# EAGLE board WSTL18P2 (EAGLE 7.7.0)
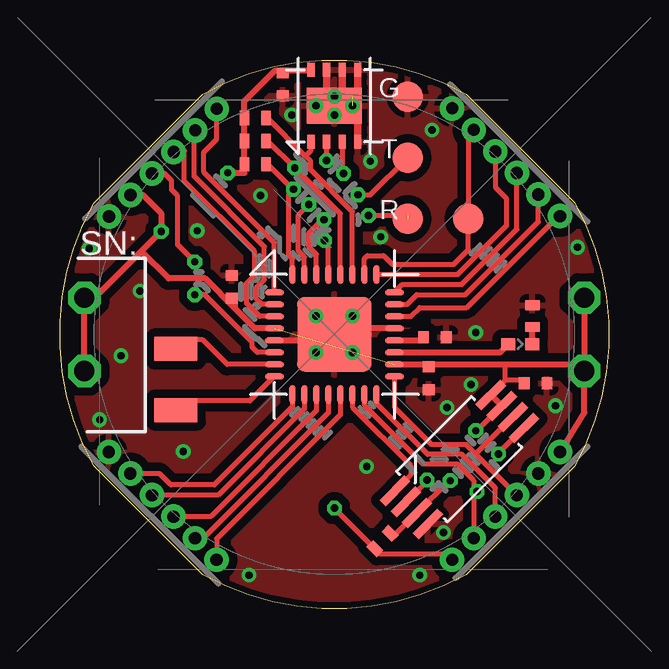
[diagram p0: board, top side]
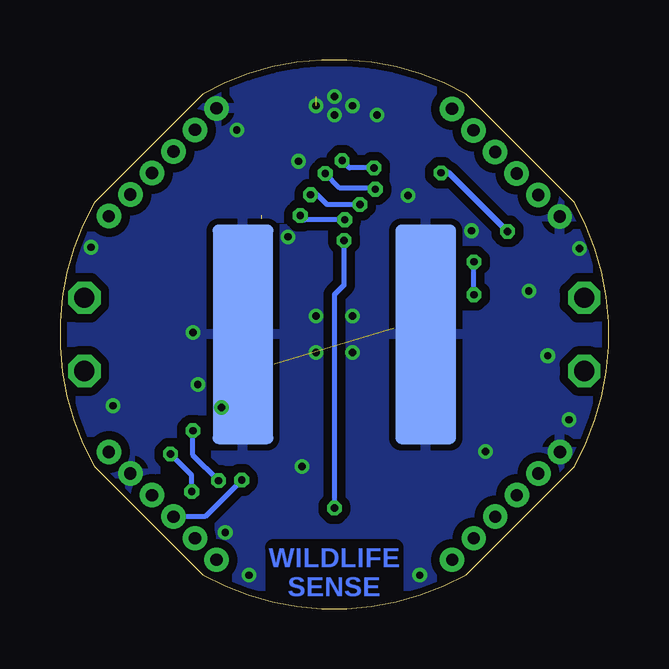
[diagram p1: board, bottom side, seen from below]

Size 22.86 x 22.86 mm. Coordinates in mm from the lower left corner, seen from the top.
Outline: 5.95,1.42 1.42,5.95 arc-59 1.42,16.92 5.95,21.44 arc-59 16.92,21.44 21.44,16.92 arc-59 21.44,5.95 16.92,1.42 arc-59 5.95,1.42
Copper layers (1*16): Top 0.035mm / dielectric 1.5mm / Bottom 0.035mm
Design rules "Nikos-SeeedStudio_2layer_DRU_no_angle_20140221": minimum track width 6mil, minimum drill 12mil, track to track 6mil, track to pad 6mil, pad to pad 6mil, via to via 6mil, smd to smd 0mil, copper to edge 10mil, drill to drill 10mil, minimum pad ring 10mil, minimum via ring 6mil, stop-mask expansion 0mil, vias tented up to drill 100mil, thermal gap 10mil
Net classes: 1 GND: width 0.254 mm, drill 0.305 mm, clearance 0.356 mm; 2 Signal: width 0.203 mm, drill 0.305 mm, clearance 0.203 mm

## Footprints (pad centres in the part's own frame; a part is rotated, then mirrored left to right if it is on the bottom)
CAP_0402 = smd 0.45 x 0.5: 1 -0.475,0; 2 0.475,0
1X6_1.27_ROUND = drill 0.508 pad 0.813: 1 0,0; 2 1.27,0; 3 2.54,0; 4 3.81,0; 5 5.08,0; 6 6.35,0
LED_0402 = smd 0.6 x 0.5: ANODE -0.5,0; CATHODE 0.5,0
ATMEGA328PB_VFQFN32 = smd 0.8 x 0.25: 1 -2.5,1.75; 2 -2.5,1.25; 3 -2.5,0.75; 4 -2.5,0.25; 5 -2.5,-0.25; 6 -2.5,-0.75; 7 -2.5,-1.25; 8 -2.5,-1.75; 17 2.5,-1.75; 18 2.5,-1.25; 19 2.5,-0.75; 20 2.5,-0.25; 21 2.5,0.25; 22 2.5,0.75; 23 2.5,1.25; 24 2.5,1.75 | smd 0.25 x 0.8: 9 -1.75,-2.5; 10 -1.25,-2.5; 11 -0.75,-2.5; 12 -0.25,-2.5; 13 0.25,-2.5; 14 0.75,-2.5; 15 1.25,-2.5; 16 1.75,-2.5; 25 1.75,2.5; 26 1.25,2.5; 27 0.75,2.5; 28 0.25,2.5; 29 -0.25,2.5; 30 -0.75,2.5; 31 -1.25,2.5; 32 -1.75,2.5 | smd 3.1 x 3.1: PAD 0,0
TSSSOP-8 = smd 1.45 x 0.35: 1 -2.825,0.975; 2 -2.825,0.325; 3 -2.825,-0.325; 4 -2.825,-0.975; 5 2.825,-0.975; 6 2.825,-0.325; 7 2.825,0.325; 8 2.825,0.975
RES_0402 = smd 0.4 x 0.6: 1 -0.45,0; 2 0.45,0
ABS07AIG = smd 1.8 x 1: P$1 0,1.275; P$2 0,-1.275
MAX30205_TDFN8 = smd 0.6 x 0.3: 1 -1.5,0.975; 2 -1.5,0.325; 3 -1.5,-0.325; 4 -1.5,-0.975; 5 1.5,-0.975; 6 1.5,-0.325; 7 1.5,0.325; 8 1.5,0.975 | smd 1.5 x 2.3: PAD 0,0
CR2032-LINX-M-THM = drill 0.838 octagon: BATT1 -10.414,1.524; BATT2 -10.414,-1.524; BATT3 10.414,-1.524; BATT4 10.414,1.524 | smd 2.54 x 9.144: GND 3.81,0; GND1 -3.81,0
4_PIN_0.1INCH_POGO_PADS_ANGLE = smd 1.27 x 1.27: 1 0,2.54; 2 0,0; 3 -2.54,0; 4 -5.08,0

## Placement (x,y rotation side)
C1  0.1uF  [CAP_0402]  7.16,13.41 90 top
C2  0.1uF  [CAP_0402]  15.37,9.6 270 top
C3  0.1uF  [CAP_0402]  15.62,11.3 0 top
C4  0.1uF  [CAP_0402]  9.27,21.85 270 top
C5  0.1uF  [CAP_0402]  19.81,9.4 0 top
CON1  1X6CONN-1.27-ROUND  [1X6_1.27_ROUND]  20.83,6.53 225 top
CON2  1X6CONN-1.27-ROUND  [1X6_1.27_ROUND]  2.03,6.53 315 top
CON3  1X6CONN-1.27-ROUND  [1X6_1.27_ROUND]  20.83,16.36 135 top
CON4  1X6CONN-1.27-ROUND  [1X6_1.27_ROUND]  6.53,20.83 225 top
LED0  LED_0402  [LED_0402]  19.18,11.03 0 top
MCU  ATMEGA328PBVQFN32  [ATMEGA328PB_VFQFN32]  11.43,11.43 0 top
MEM  AT25DN512C-XMHF-B  [TSSSOP-8]  16.64,6.22 45 top
R1  10k  [RES_0402]  13.44,2.82 225 top
R2  4.7k  [RES_0402]  8.13,20.45 0 top
R3  4.7k  [RES_0402]  8.13,19.48 0 top
R4  4.7k  [RES_0402]  8.13,18.52 0 top
R5  1k  [RES_0402]  19.69,12.19 90 top
T1  ABS07AIG  [ABS07AIG]  4.83,9.55 0 top
TMP  MAX30205  [MAX30205_TDFN8]  11.43,20.96 90 top
U$1  LINX-CR2032-BAT-HLD-M-THM  [CR2032-LINX-M-THM]  11.43,11.43 0 bottom
UART  4_PIN_0.1_INCH_POGO_CONN_ANGLE  [4_PIN_0.1INCH_POGO_PADS_ANGLE]  14.48,16.26 270 top

## Library data of the parts
C1-C5 LED0 R1-R5 = Passives
CON1-CON4 = AVR_ISP_127
MCU = ATMEGA328PB
MEM = Memory
T1 = ABS07AIG
TMP = MAX30205
U$1 = Battery_holders
UART = Connectors

## Nets
GND [GND]: C1.2 C2.2 C3.2 C4.2 C5.2 CON1.2 CON2.1 CON3.6 CON4.6 MCU.5 MCU.21 MCU.PAD MEM.4 R5.2 TMP.4 TMP.5 TMP.6 TMP.7 TMP.PAD U$1.GND U$1.GND1 UART.4
MEM_CS [Signal]: MCU.14 MEM.1
MISO0 [Signal]: CON1.4 MCU.16 MEM.2
MOSI0 [Signal]: CON1.5 MCU.15 MEM.5
N$1 [Signal]: MCU.8 T1.P$2
N$2 [Signal]: MCU.7 T1.P$1
N$3: C3.1 MCU.20
N$4: LED0.CATHODE R5.1
PB0: CON2.5 MCU.12
PB1: CON2.6 MCU.13
PC0: CON3.2 MCU.23
PC1: CON3.3 MCU.24
PC2: CON3.4 MCU.25
PC3: CON3.5 MCU.26 UART.1
PD3: CON4.1 MCU.1
PD4: CON4.2 MCU.2
PD5: CON2.2 MCU.9
PD6: CON2.3 MCU.10
PD7: CON2.4 MCU.11
PE0: CON4.3 MCU.3
PE1: CON4.4 MCU.6
PE2: LED0.ANODE MCU.19
PE3: CON3.1 MCU.22
RESET [Signal]: CON1.6 MCU.29 R1.2
RXD0 [Signal]: MCU.30 UART.2
SCK0 [Signal]: CON1.3 MCU.17 MEM.6
SCL0 [Signal]: MCU.28 R3.2 TMP.2
SDA0 [Signal]: MCU.27 R2.2 TMP.1
TMP_INT: MCU.32 R4.2 TMP.3
TXD0 [Signal]: MCU.31 UART.3
VCC: C1.1 C2.1 C4.1 C5.1 CON1.1 CON4.5 MCU.4 MCU.18 MEM.3 MEM.7 MEM.8 R1.1 R2.1 R3.1 R4.1 TMP.8 U$1.BATT1 U$1.BATT2 U$1.BATT3 U$1.BATT4

## Tracks (layer width: path | path; a pad name or v marks a point on that pad's centre or on a via)
GND  (via drill 0.3)  (1 unrouted)
  Top 0.254: MCU.5 10.67,11.18 | 10.67,11.18 v10.67,10.67 | MCU.21 12.19,11.68 v12.19,12.19 | 10.67,11.18 10.92,11.43 MCU.PAD
  Top 0.305: TMP.4 12.41,20.58 v12.19,20.96 | TMP.5 12.41,21.34 12.19,21.34 | TMP.6 11.76,21.34 v11.43,21.34 | TMP.7 11.11,21.34 v10.67,20.96
  other vias: 1.65,7.88 11.43,20.58 2.54,10.54 16.13,8.38 21.57,15.06 15.5,19.94 9.65,20.58 1.22,15.01 10.67,12.19 12.19,10.67 5.13,6.56 12.93,18.65 5.72,15.75 8.36,17.22 20.65,8.46 17.32,11.51 13.36,15.5 15.98,3.18 14.99,1.4 7.88,1.4 17.12,9.35 12.78,5.92 3.33,13.24
  pour Bottom: -1.78,-1.78 25.4,-1.78 25.4,26.04 -1.78,26.04
  pour Top: -1.78,-1.78 24.77,-1.78 24.77,25.66 -1.78,25.66
MEM_CS
  Top 0.203: MCU.14 12.18,8.4 14.61,5.97 14.61,5.57 MEM.1
MISO0  (via drill 0.3)
  Top 0.203: CON1.4 18.14,5.03 16.74,6.43 15.32,6.43 13.18,8.56 MCU.16 | MEM.2 15.29,5.34 v15.29,5.36
  Bottom 0.203: v15.29,5.36 16.82,3.84 CON1.4
MOSI0  (via drill 0.3)
  Top 0.203: MCU.15 12.68,8.48 15.14,6.02 16.56,6.02 17.24,5.35 17.24,4.88 | 17.24,4.88 CON1.5 | MEM.5 18.26,6.47 v18.26,6.45 | v17.38,4.88 17.24,4.88
  Bottom 0.203: v17.38,4.88 17.38,5.56 v18.26,6.45
N$1
  Top 0.203: MCU.8 7.91,8.66 4.83,8.66 T1.P$2
N$2
  Top 0.203: MCU.7 6.97,10.18 5.94,11.21 4.83,11.21 T1.P$1
N$3
  Top 0.254: MCU.20 14.99,11.18 C3.1
N$4
  Top 0.254: LED0.CATHODE 19.68,10.9 19.69,11.28 R5.1
PB0
  Top 0.203: MCU.12 11.18,8.16 5.96,2.94 CON2.5
PB1
  Top 0.203: MCU.13 11.68,8.07 6.52,2.92 CON2.6
PC0
  Top 0.203: MCU.23 14.46,12.68 14.86,13.08 16.89,13.08 19.93,16.12 CON3.2
PC1
  Top 0.203: MCU.24 14.26,13.51 16.74,13.51 19.03,15.81 CON3.3
PC2
  Top 0.203: MCU.25 16.57,13.93 18.59,15.95 18.59,17.1 18.14,17.55 CON3.4
PC3
  Top 0.203: MCU.26 12.68,14.59 12.8,14.71 13.49,14.71 13.84,14.35 16.41,14.35 17.02,14.96 UART.1 17.02,19.73 CON3.5
PD3
  Top 0.203: MCU.1 8.93,15.25 6,18.19 6,19.03 6.53,19.56 CON4.1
PD4
  Top 0.203: MCU.2 8.4,12.68 8.18,12.9 8.18,13.39 8.51,13.72 8.51,15.09 5.59,18.01 5.59,19.97 CON4.2
PD5
  Top 0.203: MCU.9 9.68,8.41 6.43,5.16 4.62,5.16 4.15,5.63 CON2.2
PD6
  Top 0.203: MCU.10 10.18,8.33 6.59,4.73 CON2.3
PD7
  Top 0.203: MCU.11 10.68,8.24 6.27,3.84 CON2.4
PE0
  Top 0.203: MCU.3 8.32,12.18 7.77,12.73 7.77,13.57 8.1,13.9 8.1,14.89 5.18,17.81 5.18,19.08 4.97,19.29 CON4.3
PE1  (via drill 0.3)
  Top 0.203: MCU.6 8.22,10.68 8,10.9 8,11.1 6.02,13.08 v5.61,13.08 | CON4.4 4.35,18.14 4.65,17.83 4.65,17.45 4.9,17.2 4.9,15.17 v5.61,14.45
  Bottom 0.203: v5.61,13.08 v5.61,14.45
PE2
  Top 0.254: 18.68,11.14 LED0.ANODE 18.33,10.68 MCU.19
PE3
  Top 0.203: MCU.22 14.62,12.18 14.99,12.55 16.94,12.55 20.75,16.36 CON3.1
RESET  (via drill 0.3)
  Top 0.203: MCU.29 11.18,15.19 v11.03,15.34 | v11.43,4.19 13.25,2.38 R1.2 13.34,2.29 16.09,2.29 CON1.6
  Top 0.254: MCU.29
  Bottom 0.203: v11.43,4.19 11.43,13.08 11.03,13.49 v11.03,15.34
RXD0  (via drill 0.3)  (1 unrouted)
  Top 0.203: MCU.30 10.68,14.77 10.36,15.09 10.36,15.65 10.92,16.21 v11,16.21 10.95,16.21 | v12.85,16.38 14.48,16.38
  Bottom 0.203: v11,16.21 12.68,16.21 v12.85,16.38
SCK0
  Top 0.203: MCU.17 13.93,8.4 15.5,6.83 16.93,6.83 17.34,6.42 | CON1.3 17.34,6.42 | MEM.6 17.34,6.47 17.34,6.42
SCL0  (via drill 0.3)
  Top 0.203: MCU.28 11.68,16.46 v9.78,18.37 8.66,19.48 R3.2 | v11.11,18.67 TMP.2
  Bottom 0.203: v9.78,18.37 10.8,18.37 v11.11,18.67
SDA0
  Top 0.203: MCU.27 12.18,16.55 10.44,18.29 10.44,18.65 10.23,18.86 | TMP.1 10.46,19.09 10.23,18.86 | 10.23,18.86 8.64,20.45 R2.2
TMP_INT  (via drill 0.3)
  Top 0.203: MCU.32 9.68,14.58 9.53,14.73 9.53,17.25 v9.73,17.48 9.7,17.48 8.66,18.52 R4.2 | TMP.3 11.76,18.21 v11.81,18.14
  Bottom 0.203: v9.73,17.48 9.78,17.53 11.2,17.53 v11.81,18.14
TXD0  (via drill 0.3)
  Top 0.203: MCU.31 10.18,14.66 9.93,14.91 9.93,16.41 v10.36,16.84 | v12.42,17.25 12.93,17.25 UART.3
  Bottom 0.203: v10.36,16.84 11.74,16.84 12.14,17.25 v12.42,17.25
VCC  (via drill 0.3)  (1 unrouted)
  Top 0.203: C1.1 7.31,12.94 7.31,12.49 | MEM.7 17.37,7.42 v17.32,7.42 | C5.1 19.34,9.53 18.56,9.53 | 18.56,9.53 MEM.8 | 18.56,9.53 18.56,10.18 18.92,10.18 | v16.26,5.34 16.21,5.34 MEM.3 13.89,3.01 R1.1
  Top 0.254: MCU.4 8.12,11.68 7.31,12.49 6.05,13.77 4.52,13.77 3.39,14.9 | MCU.18 15.37,10.18 | C2.1 15.37,10.18 | TMP.8 10.41,22.41 9.27,22.41 | 9.27,22.41 8.94,22.41 7.68,21.14 R2.1 R3.1 R4.1 7.68,18.16 v6.99,18.16 | C4.1 9.27,22.41 | 15.37,10.18 18.92,10.18 21.57,10.18 U$1.BATT2 | MEM.8 MEM.7 | 3.39,14.9 v4.22,15.72 4.22,16.49 3.47,17.24 CON4.5 | CON1.1 21.85,8.18 U$1.BATT2 | 3.39,14.9 1.45,12.96 U$1.BATT4 U$1.BATT3 | U$1.BATT1 U$1.BATT2
  Bottom 0.203: v16.26,5.34 17.32,6.4 v17.32,7.42
  Bottom 0.254: v4.22,15.72 6.66,18.16 v6.99,18.16

## Text on the board
Bottom: WILDLIFE / SENSE
tPlace: SN: | Wildlife Sense / 2018
tNames: G | T | R
tStop: WSTL18P2